# EAGLE board NOT_Gate (EAGLE 9.2.2)
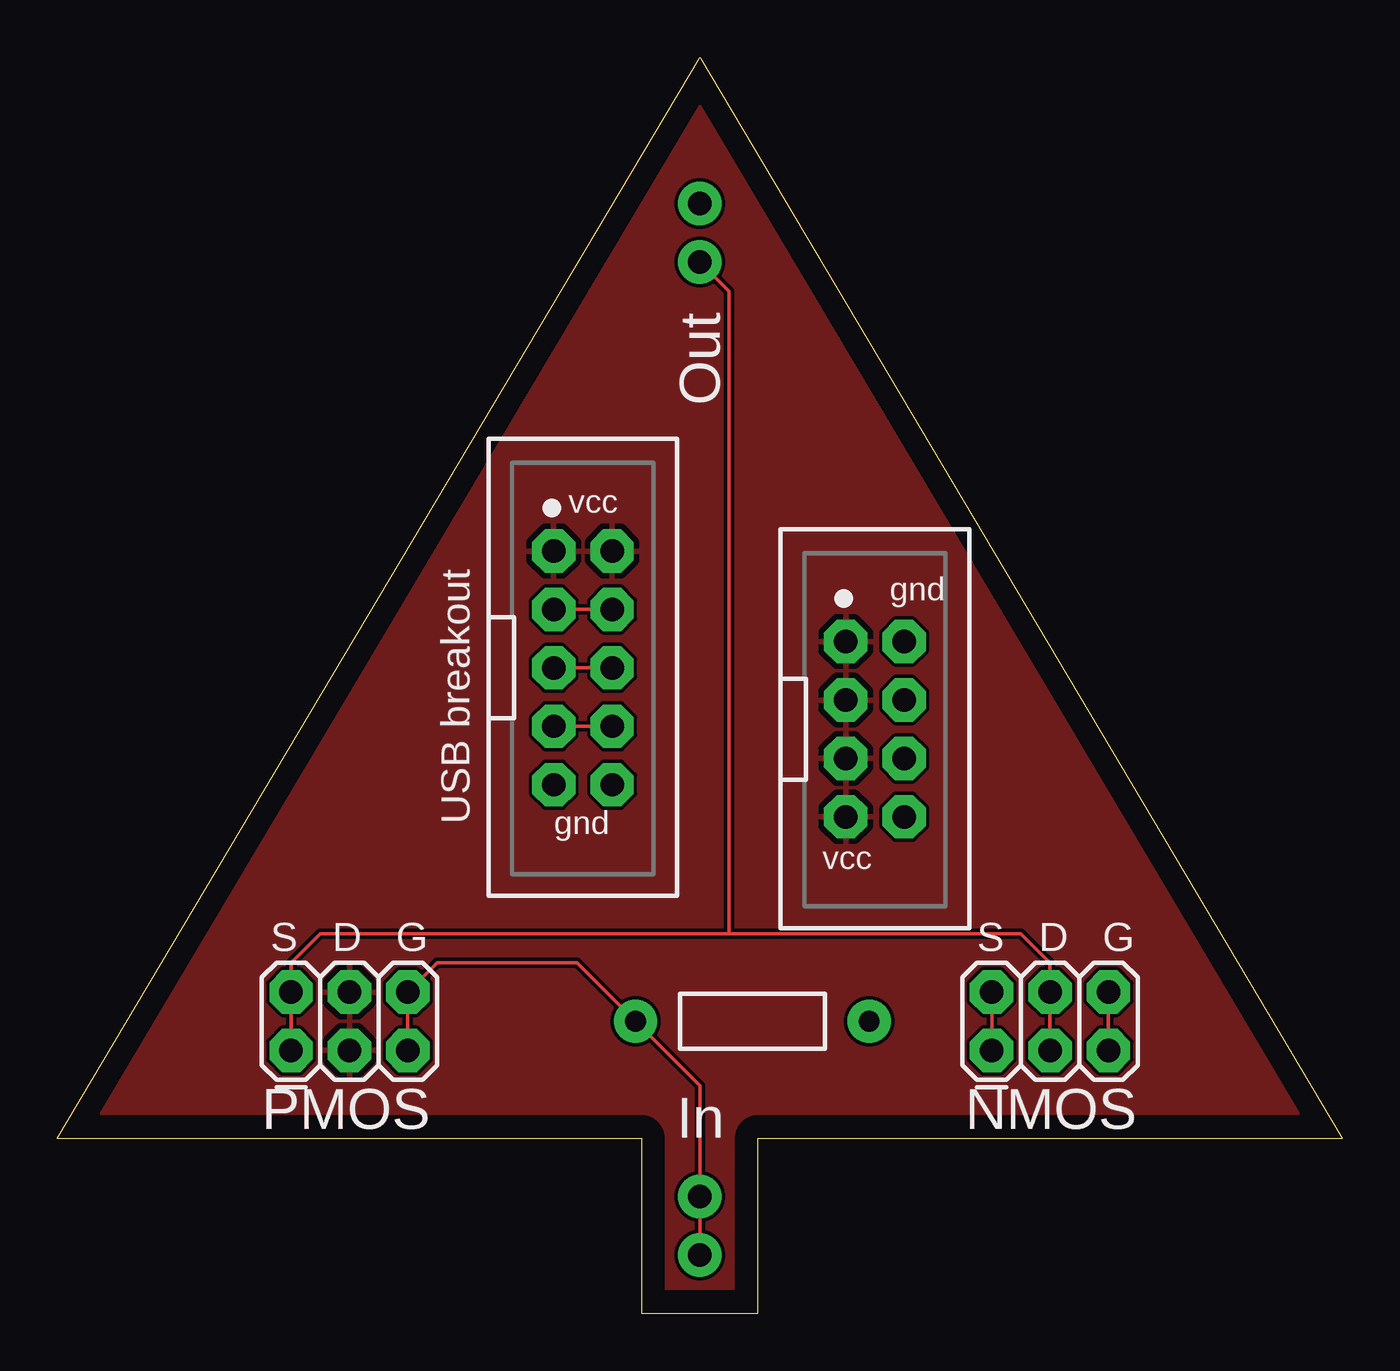
[diagram p0: board, top side]
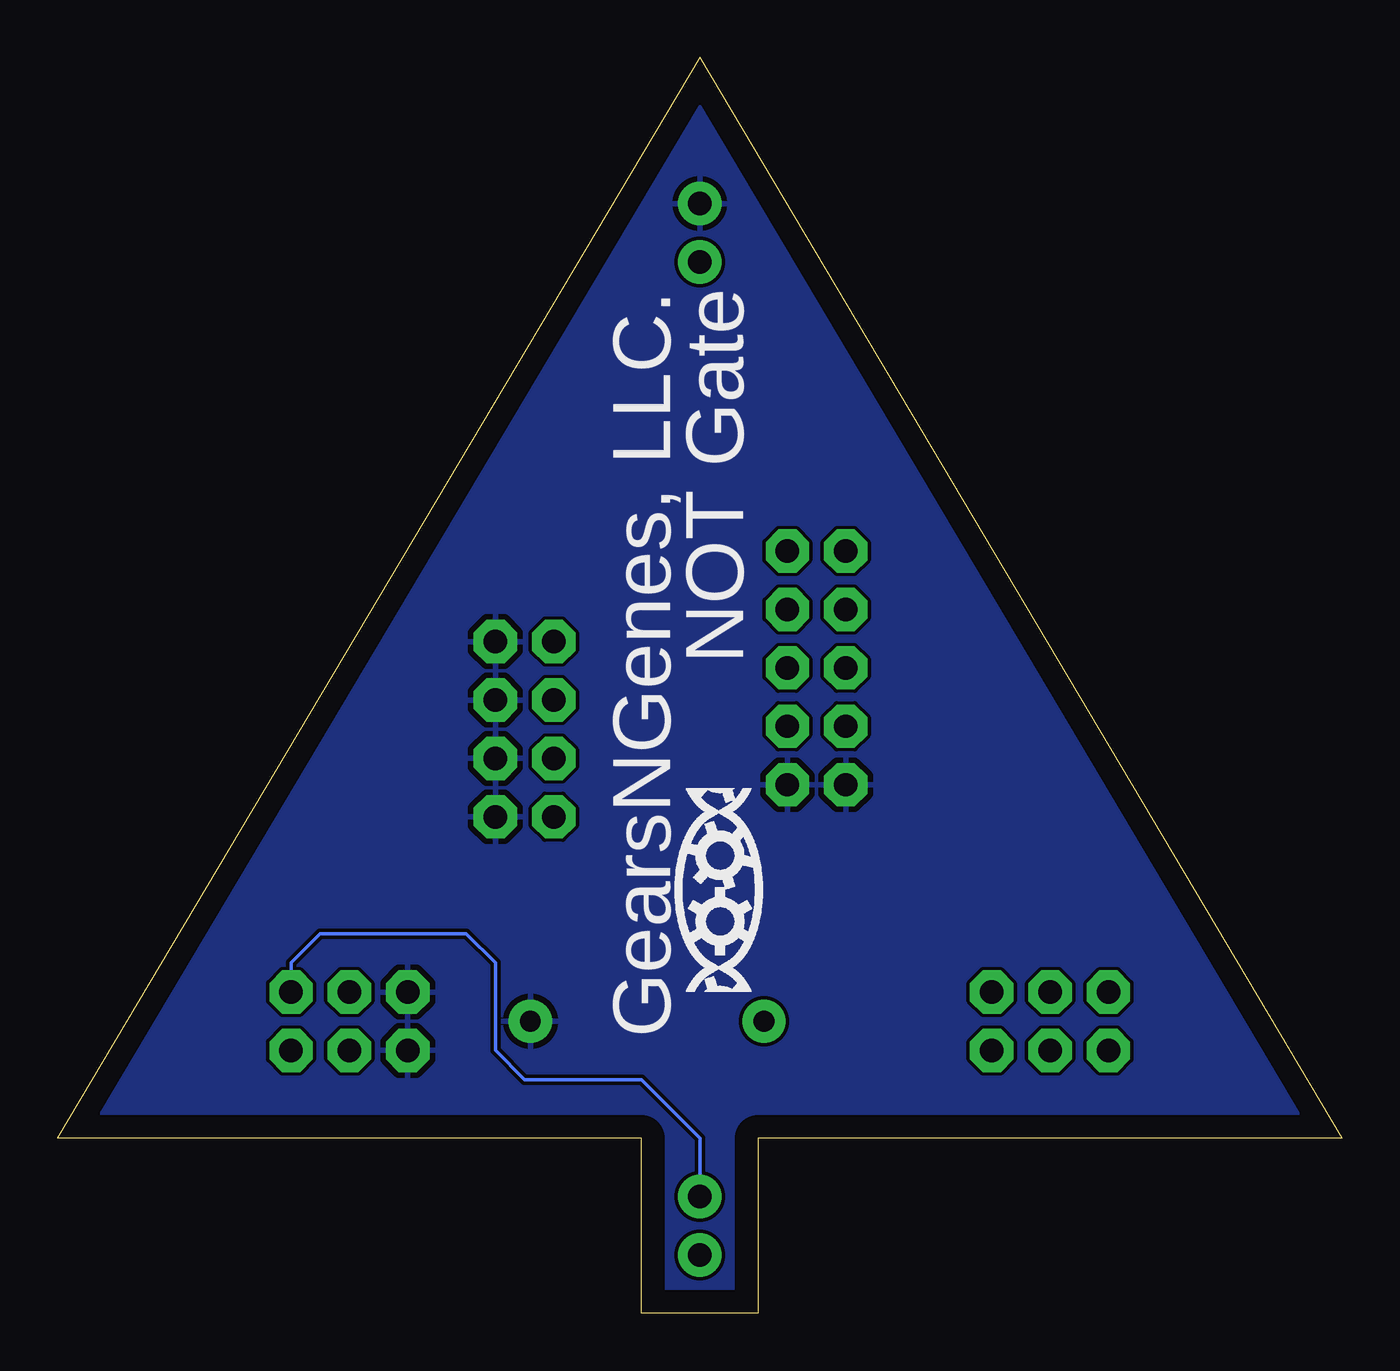
[diagram p1: board, bottom side, seen from below]

Size 55.88 x 54.61 mm. Coordinates in mm from the lower left corner, seen from the top.
Outline: 0,7.62 25.4,7.62 25.4,0 30.48,0 30.48,7.62 55.88,7.62 27.94,54.61 0,7.62
Copper layers (1*16): Top 0.035mm / dielectric 1.5mm / Bottom 0.035mm
Design rules "default": minimum track width 6mil, minimum drill 0.35mm, track to track 6mil, track to pad 6mil, pad to pad 6mil, via to via 6mil, smd to smd 6mil, copper to edge 40mil, drill to drill 6mil, minimum pad ring 10mil, minimum via ring 8mil, stop-mask expansion 4mil, vias tented up to drill 0mil, thermal gap 10mil

## Footprints (pad centres in the part's own frame; a part is rotated, then mirrored left to right if it is on the bottom)
2X5-SHROUDED = drill 1.016 pad 1.88 octagon: 1 -5.08,-1.27; 2 -5.08,1.27; 3 -2.54,-1.27; 4 -2.54,1.27; 5 0,-1.27; 6 0,1.27; 7 2.54,-1.27; 8 2.54,1.27; 9 5.08,-1.27; 10 5.08,1.27
1X02_NO_SILK = drill 1.016 pad 1.88: 1 0,0; 2 2.54,0
2X4-SHROUDED = drill 1.016 pad 1.88 octagon: 1 -3.81,-1.27; 2 -3.81,1.27; 3 -1.27,-1.27; 4 -1.27,1.27; 5 1.27,-1.27; 6 1.27,1.27; 7 3.81,-1.27; 8 3.81,1.27
2X3 = drill 1.016 pad 1.88 octagon: 1 0,0; 2 0,2.54; 3 2.54,0; 4 2.54,2.54; 5 5.08,0; 6 5.08,2.54
AXIAL-0.4 = drill 0.9 pad 1.88: P$1 -5.08,0; P$2 5.08,0

## Placement (x,y rotation side)
J1  [2X5-SHROUDED]  22.86,28.07 270 top
J2  [1X02_NO_SILK]  27.94,48.26 270 top
J4  [1X02_NO_SILK]  27.94,5.08 270 top
J5  [2X4-SHROUDED]  35.56,25.4 270 top
JP1  N_MOS1  [2X3]  40.64,11.43 0 top
JP3  P_MOS1  [2X3]  10.16,11.43 0 top
R1  [AXIAL-0.4]  30.23,12.7 180 top

## Library data of the parts
J1 J2 J4 J5 R1 = MG-Eagle_v1
JP1 JP3 = MG-Eagle_v1; PROD_ID: CONN-11566

## Nets
GND: J1.9 J1.10 J2.1 J5.2 J5.4 J5.6 J5.8 JP1.1 JP1.2 R1.P$1
N$1: J1.7 J1.8
N$2: J1.5 J1.6
N$3: J1.3 J1.4
N$7: J4.1 J4.2 JP1.5 JP1.6 JP3.5 JP3.6 R1.P$2
SRCDRN: J2.2 JP1.3 JP1.4 JP3.1 JP3.2
VCC: J1.1 J1.2 J5.1 J5.3 J5.5 J5.7 JP3.3 JP3.4

## Tracks (layer width: path | path; a pad name or v marks a point on that pad's centre or on a via)
GND
  Top 0.152: JP1.2 JP1.1
  pour Bottom: -16.51,90.17 138.43,90.17 139.7,88.9 139.7,-12.21 -27.93,-12.21 -27.93,78.75
N$1
  Top 0.152: J1.8 J1.7
N$2
  Top 0.152: J1.5 J1.6
N$3
  Top 0.152: J1.4 J1.3
N$7
  Top 0.152: JP1.5 JP1.6 | J4.2 J4.1 27.94,9.91 R1.P$2 22.61,15.24 16.51,15.24 JP3.6 JP3.5
  Bottom 0.152: JP1.6 45.72,15.24 44.45,16.51 38.1,16.51 36.83,15.24 36.83,11.43 35.56,10.16 30.48,10.16 27.94,7.62 J4.1
SRCDRN
  Top 0.152: JP3.1 JP3.2 10.16,15.24 11.43,16.51 29.21,16.51 | JP1.3 JP1.4 43.18,15.24 41.91,16.51 29.21,16.51 | J2.2 29.21,44.45 29.21,16.51
VCC
  pour Top: -27.54,90.17 139.7,90.17 139.7,-12.41 -27.54,-12.41

## Text on the board
tPlace: Out | vcc | gnd | USB breakout | gnd | vcc | S D G | S D G | PMOS | In | NMOS
bPlace: NOT Gate | GearsNGenes, LLC.